# Altium PCB CAM_BRD.PcbDoc
Units mil, origin at the board's own origin, x right, y up, seen from the top; angles counter-clockwise.
Board outline 2100 x 1600 mil, 6 copper layers (Top Layer, GND, SIG_1, SIG_2, GND_2, Bottom Layer), stack 61.112 mil thick; 13 components, 21 nets, 92 pads, 59 vias.
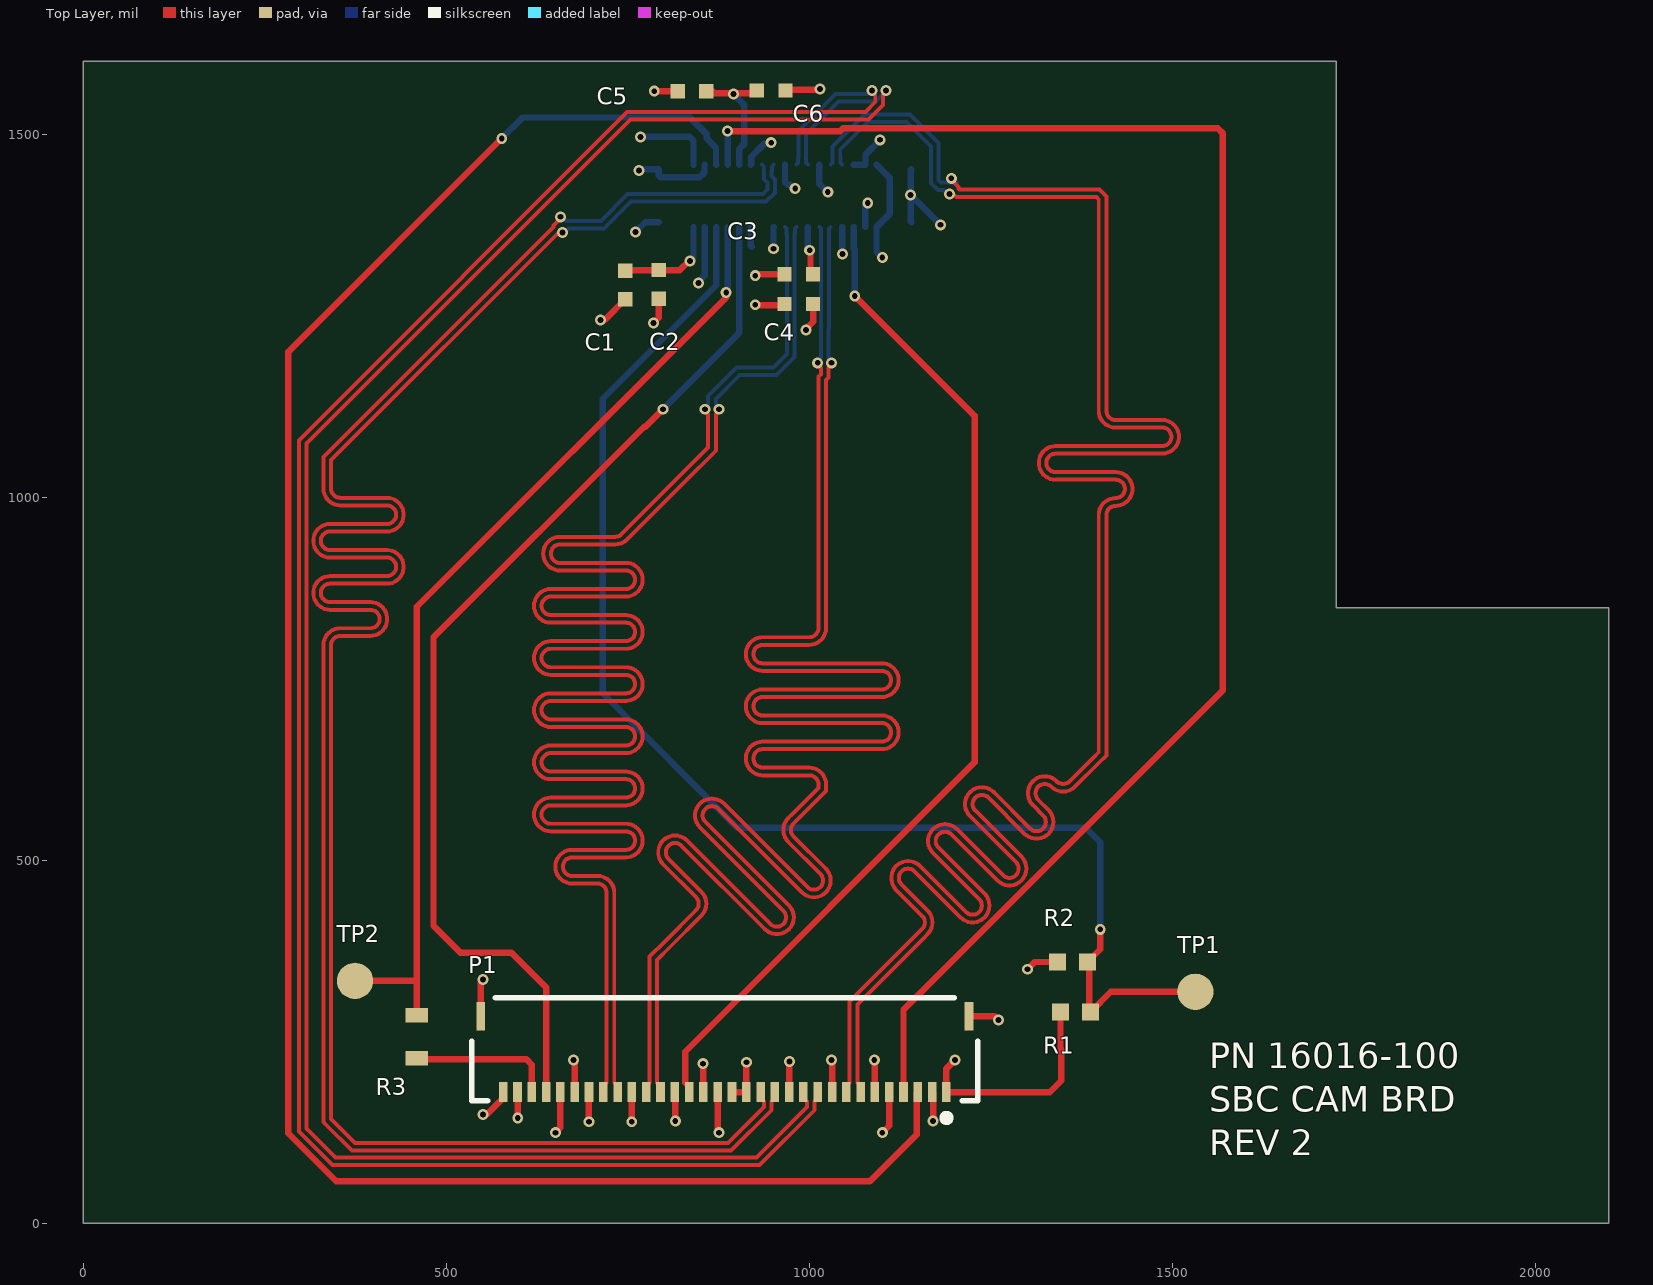
[diagram p0: Top Layer view]
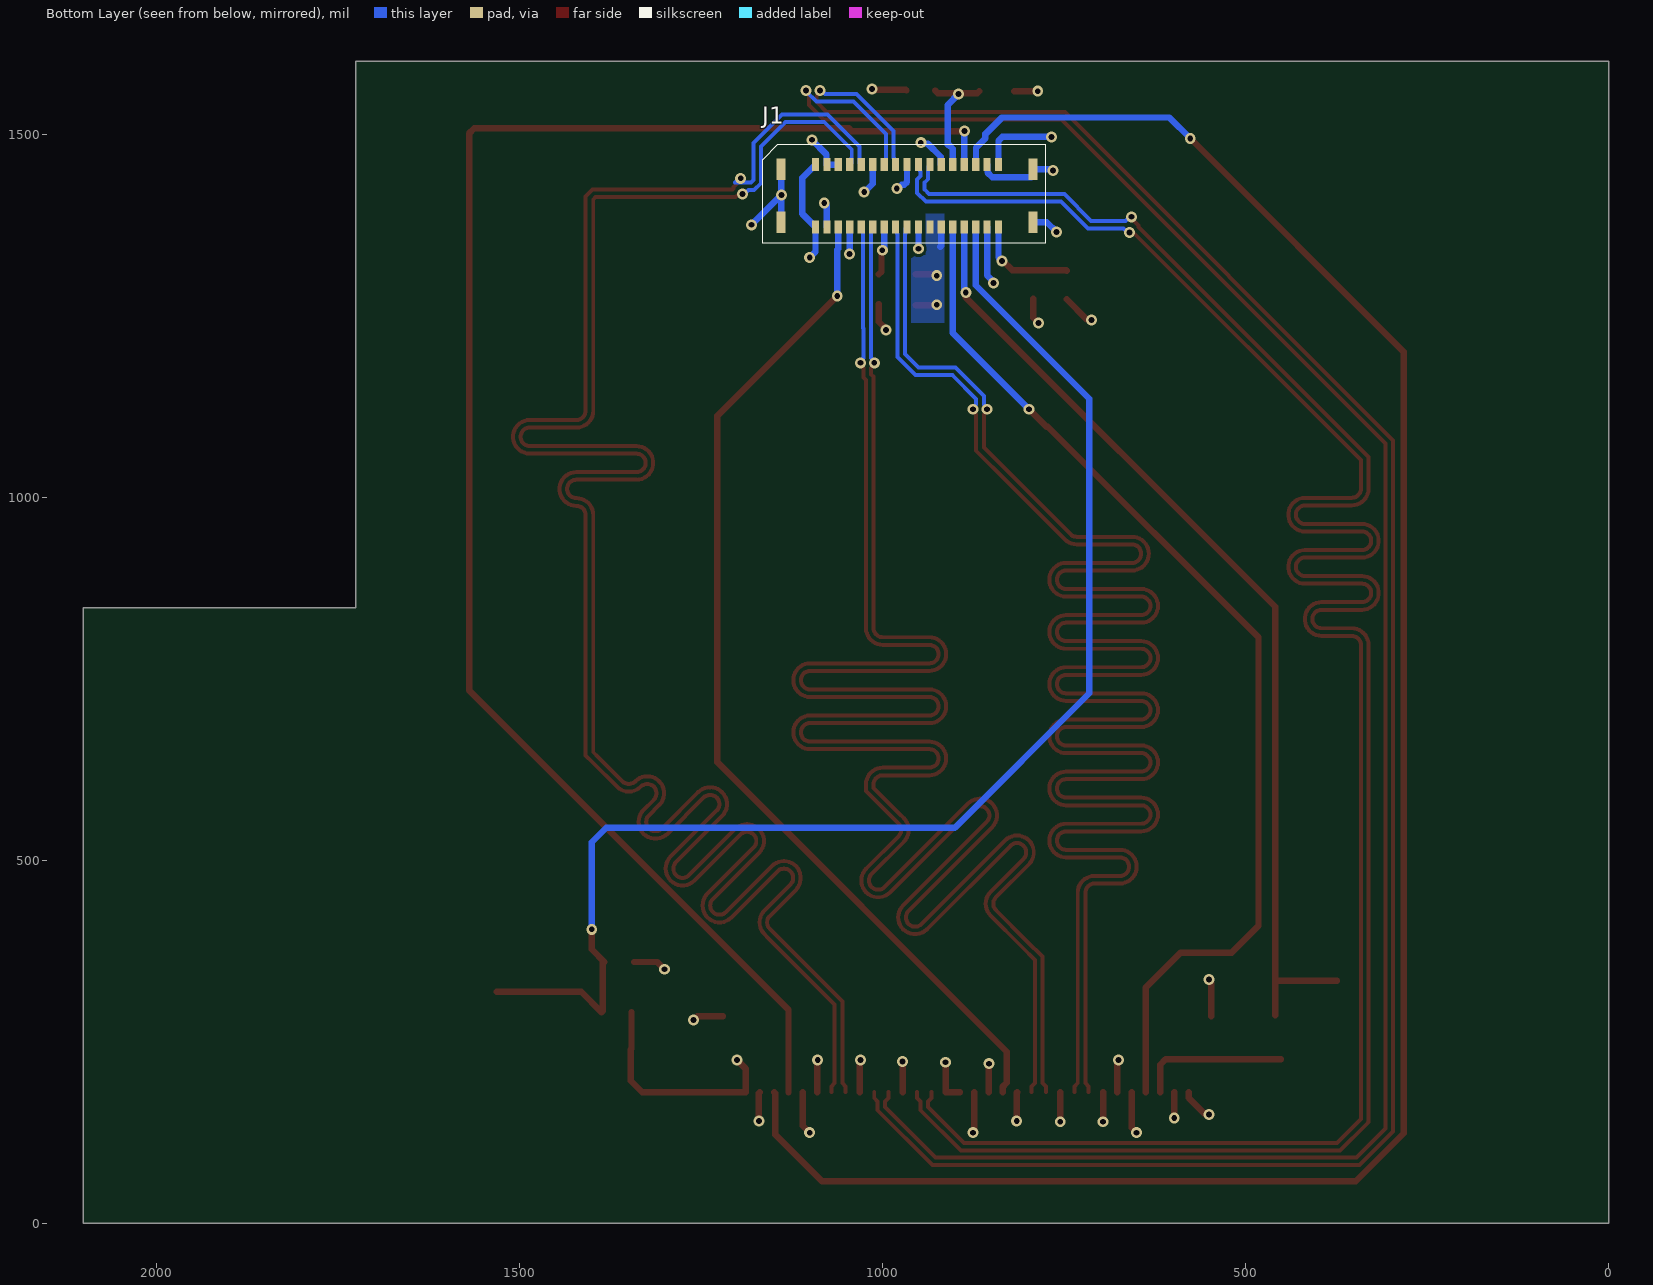
[diagram p1: Bottom Layer view, seen from below]
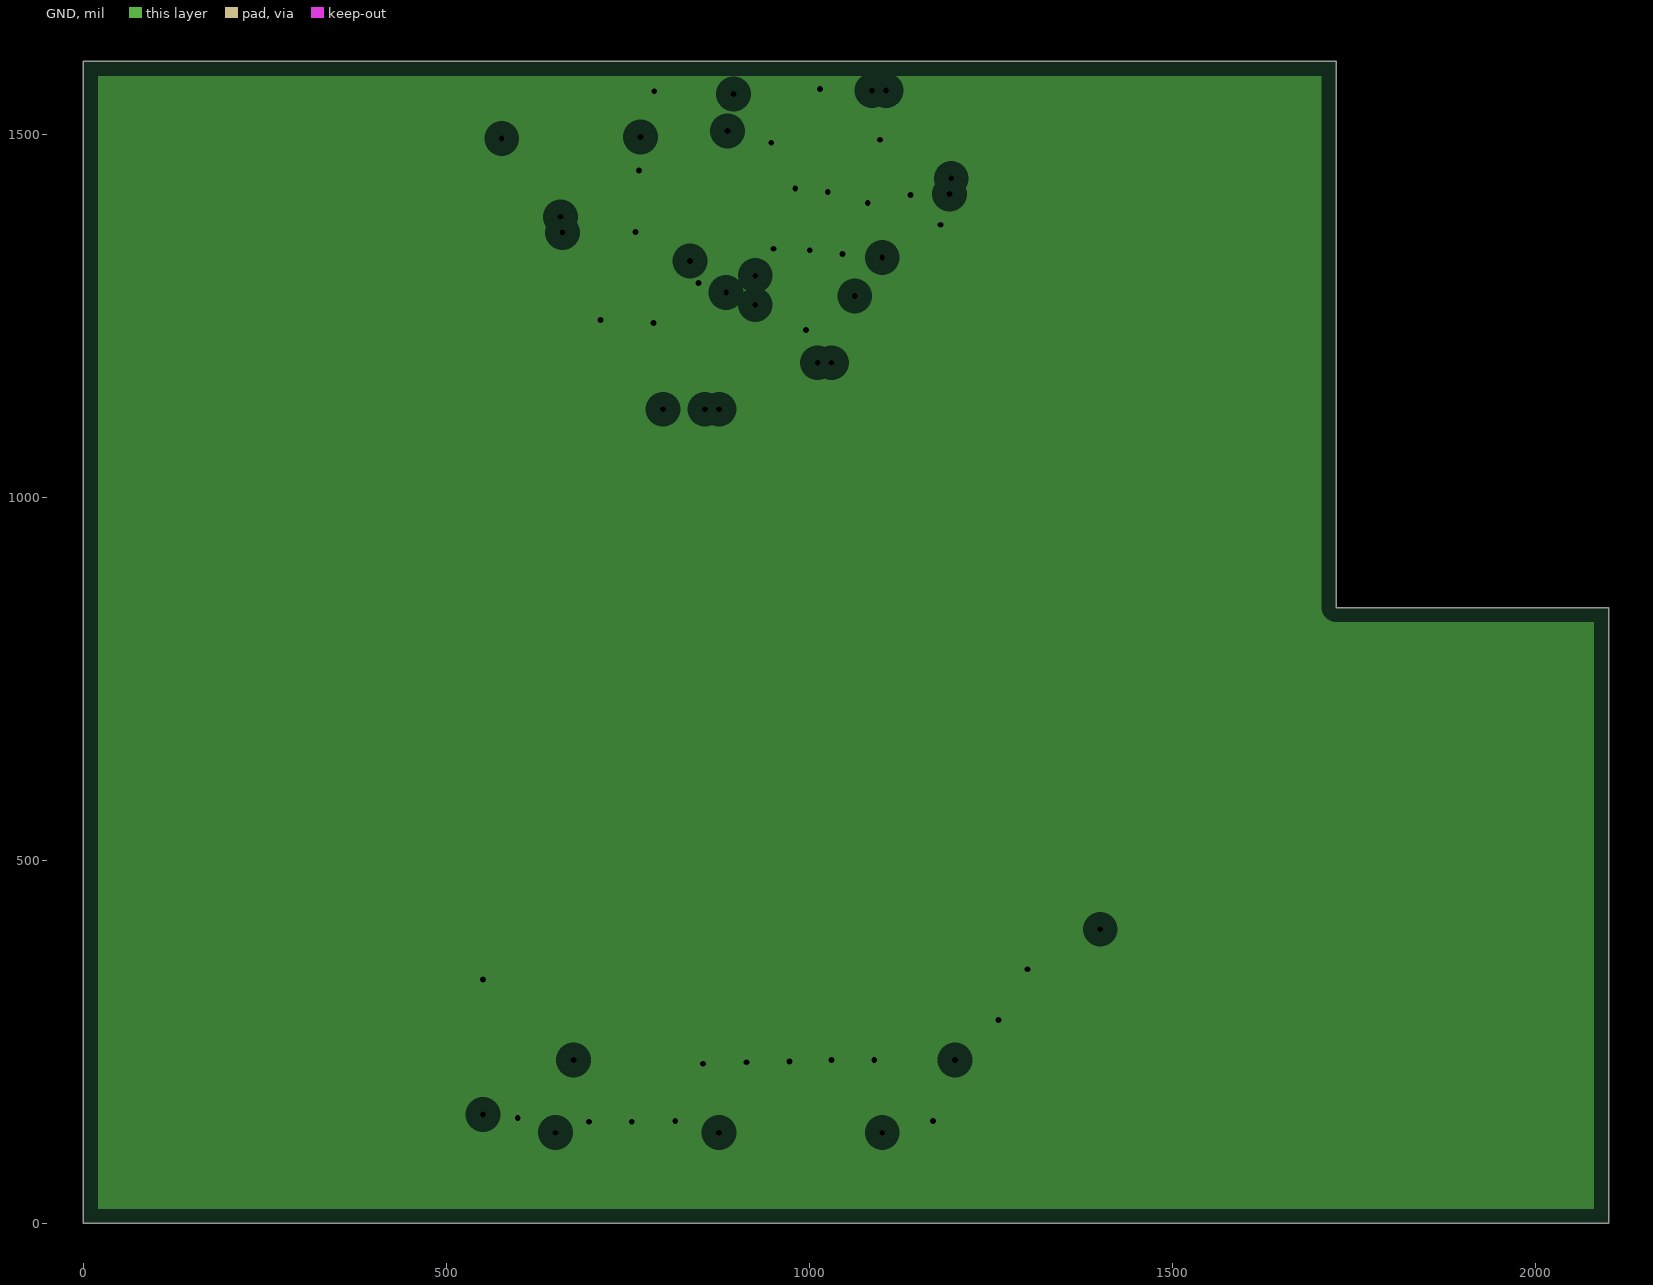
[diagram p2: GND, clearances drawn from the general rule]
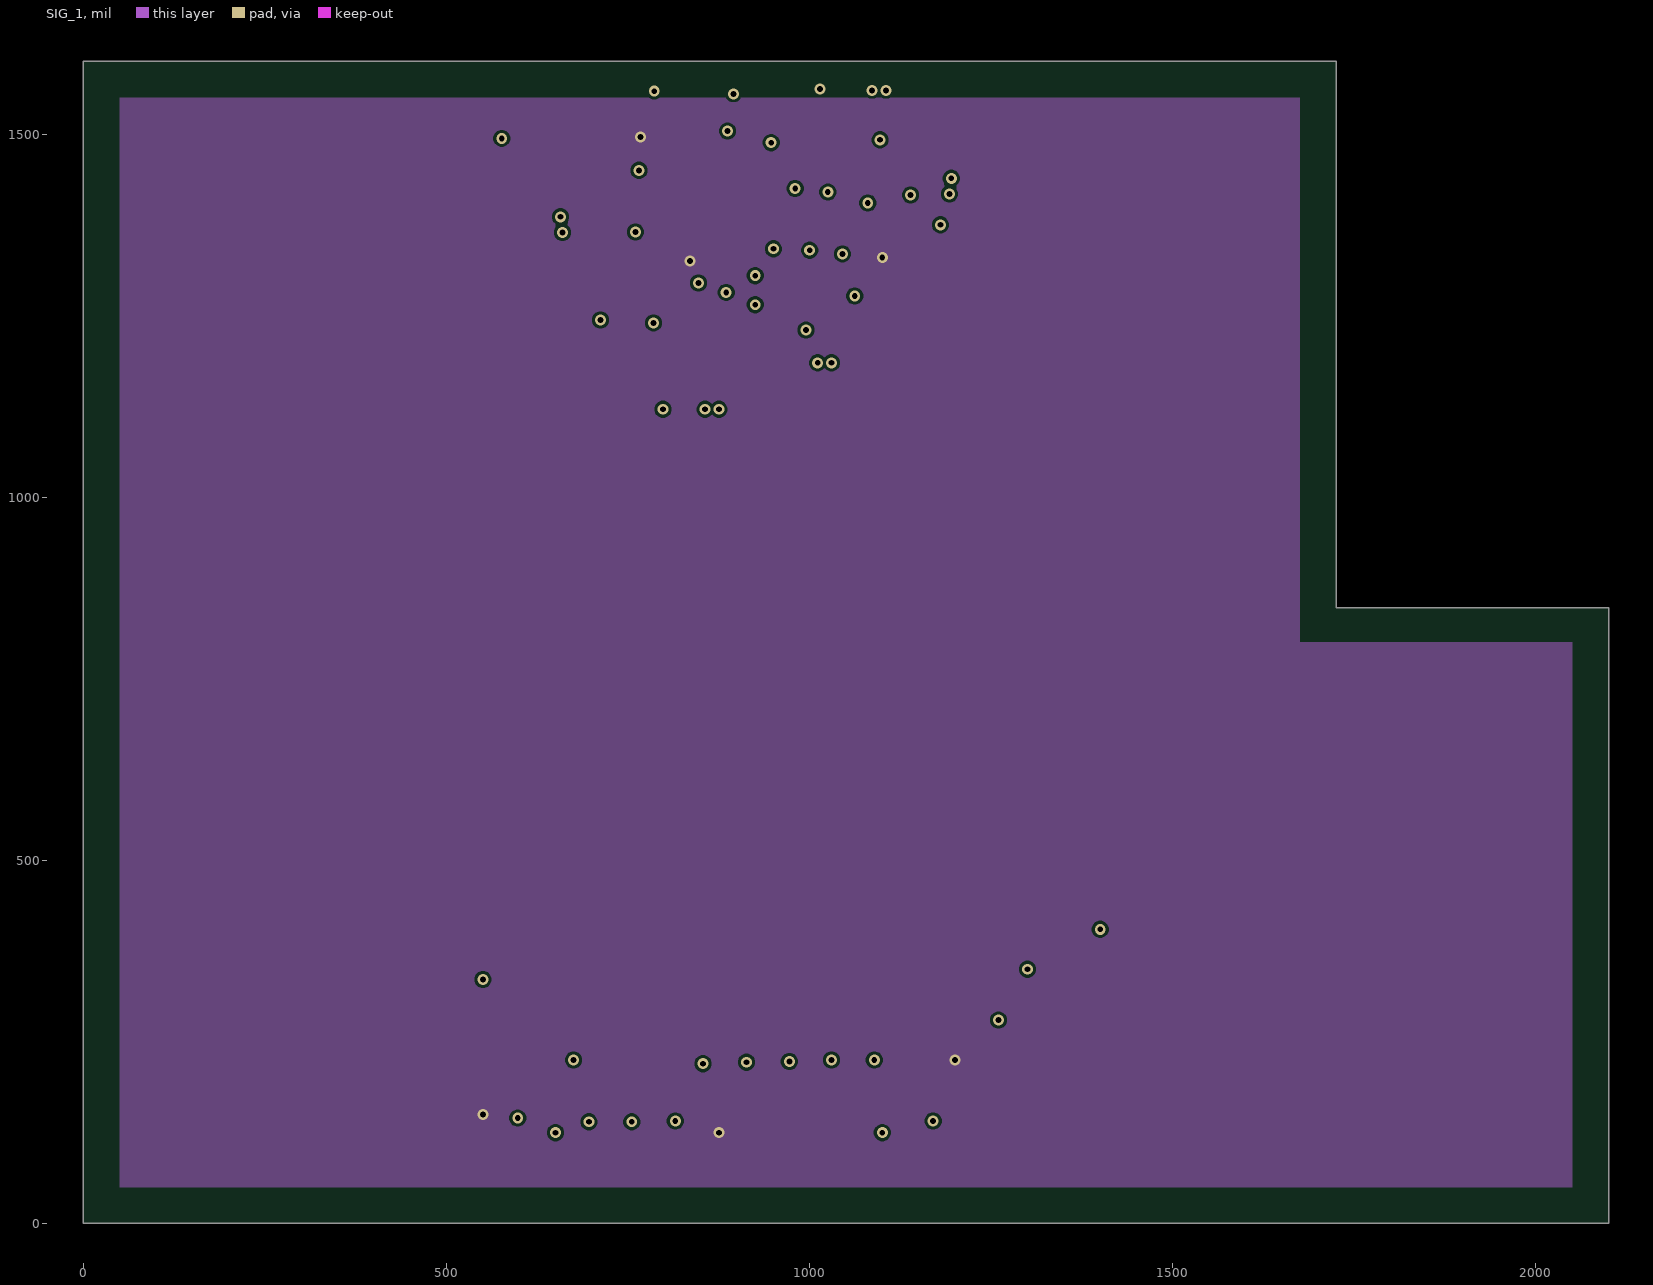
[diagram p3: SIG_1]
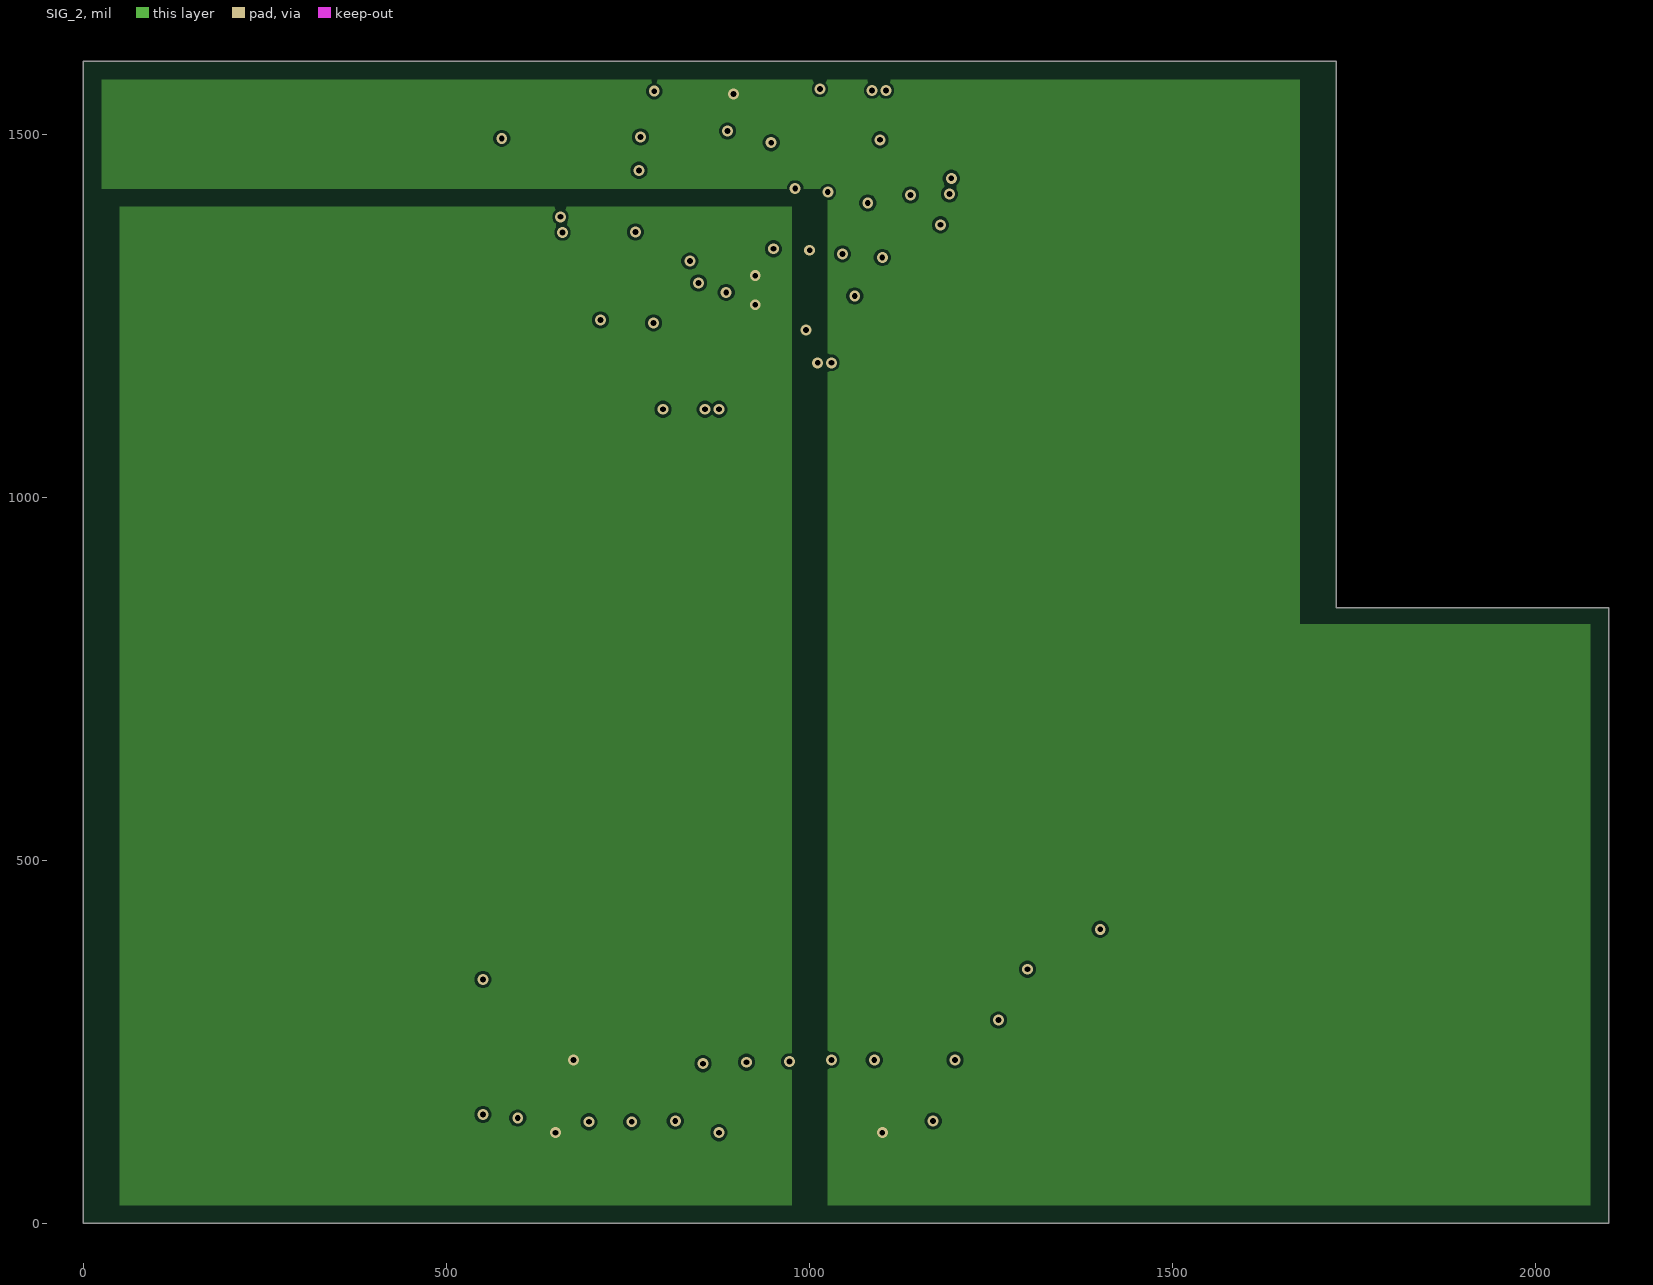
[diagram p4: SIG_2]
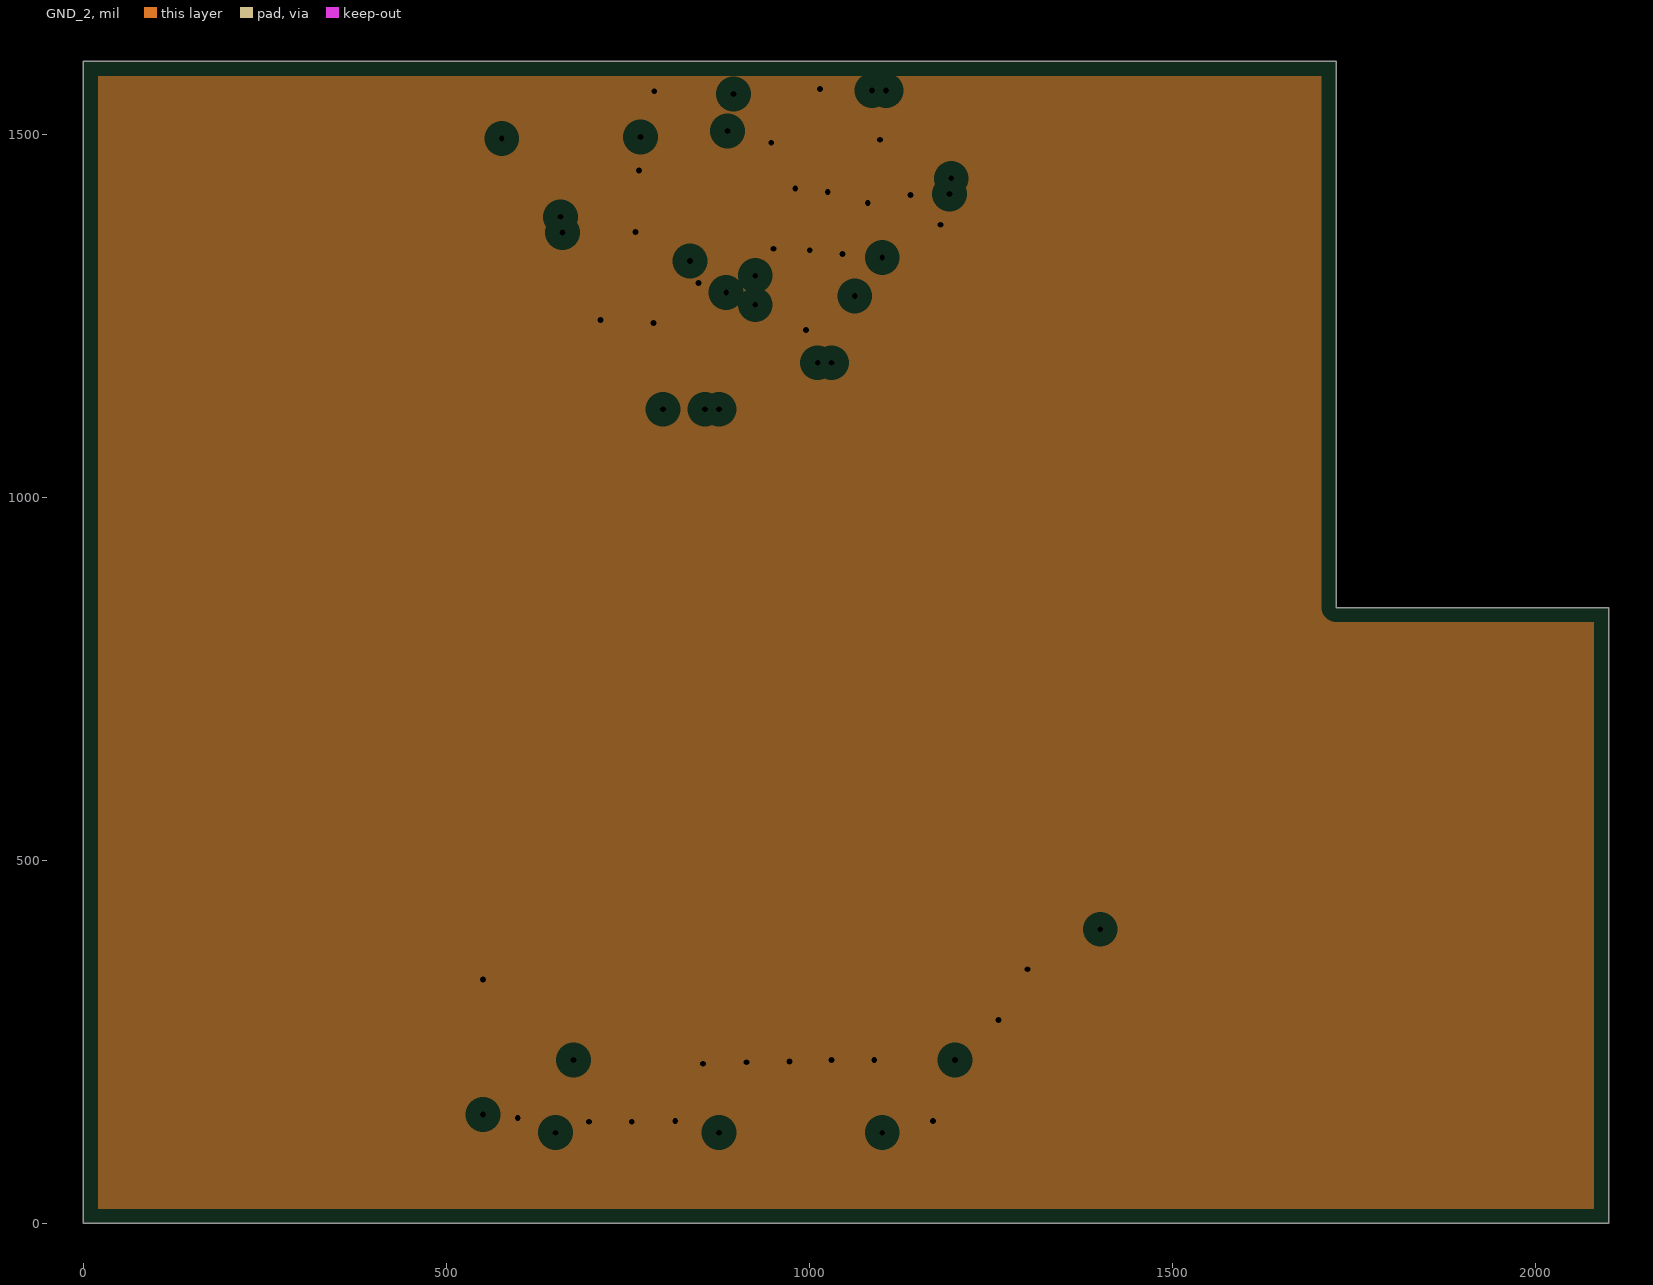
[diagram p5: GND_2, clearances drawn from the general rule]
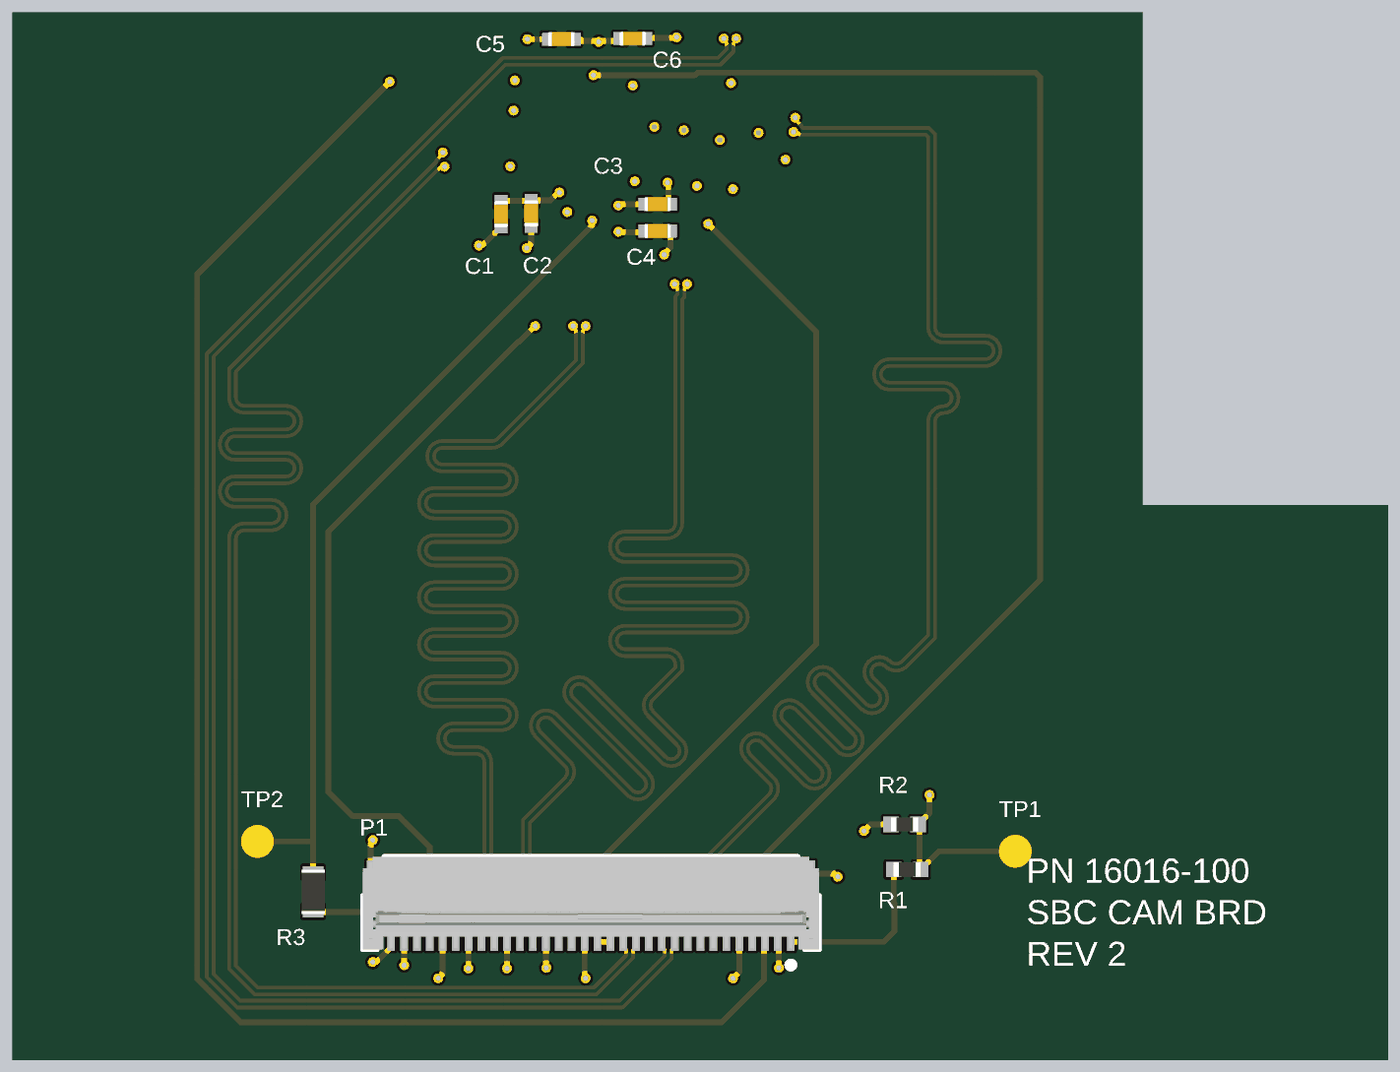
[diagram p6: 3D render of the assembled board from above, using the file's embedded part models]

## Layer stack, top to bottom
Top Solder: solder mask 0.4, Solder Resist, Dk 3.5
Top Layer: signal copper 1.4
Dielectric 2: prepreg 5, PP-006, Dk 4.1
GND: plane copper 1.378, net GND
Dielectric 4: prepreg 15.1, PP-006, Dk 4.1
SIG_1: signal copper 1.378
Dielectric 1: dielectric 12.6, FR-4, Dk 4.8
SIG_2: signal copper 1.378
Dielectric 5: prepreg 15.1, PP-006, Dk 4.1
GND_2: plane copper 1.378, net GND
Dielectric 3: prepreg 5, PP-006, Dk 4.1
Bottom Layer: signal copper 1.4
Bottom Solder: solder mask 0.4, Solder Resist, Dk 3.5

## Board outline
0,0 2100,0 2100,848 1725,848 1725,1600 0,1600

## Design rules (kind name [scope] priority, off if disabled: settings)
Clearance Clearance_diff [IsDifferentialPair] p1: gap=2 ignorepadtopadclearanceinfootprint=TRUE
Clearance [All] p2: gap=4 ignorepadtopadclearanceinfootprint=TRUE
DiffPairsRouting [All] p1: maxlimit=10.01 minlimit=5 mostfreqgap=10.72 toplayer_maxgap=5 toplayer_prefgap=5 toplayer_minwidth=5.46 toplayer_maxwidth=5.46 toplayer_prefwidth=5.46 midlayer1_mingap=10.01 midlayer1_minwidth=7.02 midlayer1_maxwidth=7.02 midlayer1_prefwidth=7.02 midlayer2_mingap=10.01 midlayer2_minwidth=7.02 midlayer2_maxwidth=7.02 midlayer2_prefwidth=7.02 bottomlayer_maxgap=5 bottomlayer_prefgap=5 bottomlayer_minwidth=5.46 bottomlayer_maxwidth=5.46 bottomlayer_prefwidth=5.46 impedanceprofiledriven=TRUE impedanceprofileid={9B9DB5E2-4D64-4961-AEE6-C745B0BC2751} impedanceprofilevalue=100.000000 maxuncoupledlength=500
MatchedLengths [InDifferentialPairClass('Diff_lanes')] p1: tolerance=50 checknetsindiffpair=FALSE checkdiffpairvsdiffpair=TRUE checkxsignals=TRUE checkothers=TRUE
MinimumSolderMaskSliver [All] p1: minsoldermaskwidth=5
PlaneClearance [All] p1: clearance=20
PlaneConnect [All] p1: planeconnectstyle=Direct reliefexpansion=20 reliefentries=4 reliefconductorwidth=10 reliefairgap=10
PolygonConnect [All] p1: connectstyle=Direct reliefconductorwidth=10 reliefentries=4 polygonreliefangle="90 Angle" airgapwidth=10
RoutingVias [All] p1: holewidth=8 width=15 viastyle="Through Hole" minholewidth=8 minwidth=15 maxholewidth=10 maxwidth=20
SolderMaskExpansion [All] p1: expansion=4 istentingtop=FALSE
Width [All] p1: maxlimit=11.99 minlimit=8.82 preferedwidth=10.65 toplayer_maxwidth=8.82 toplayer_prefwidth=8.82 midlayer1_minwidth=11.99 midlayer2_minwidth=11.99 bottomlayer_maxwidth=8.82 bottomlayer_prefwidth=8.82 impedanceprofiledriven=TRUE impedanceprofileid={878C57AC-B8C8-43F7-A392-3AFCA808DB5A} impedanceprofilevalue=50.000000 minimp=50.000000 maximp=50.000000 favimp=50.000000
26 further rules are at their usual default settings.

## Classes and differential pairs
differential pair class Diff_lanes: CS1_P1_D3 CSI_P1_CK CSI_P1_D0 CSI_P1_D1 CSI_P1_D2
component class CAM_BRD: C1 C2 C3 C4 J1 P1 R1 R2 R3 TP1 TP2
differential pair CSI_P1_D2: +CSI_P1_D2_P -CSI_P1_D2_N
differential pair CSI_P1_D1: +CSI_P1_D1_P -CSI_P1_D1_N
differential pair CSI_P1_D0: +CSI_P1_D0_P -CSI_P1_D0_N
differential pair CSI_P1_CK: +CSI_P1_CK_P -CSI_P1_CK_N
differential pair CS1_P1_D3: +CS1_P1_D3_P -CS1_P1_D3_N

## Components (designator, comment, footprint, x,y, rotation, side; value= is the part's Value field where it differs from the comment)
C1 "10uF" CAPC0402X06N 746,1292 r90 top
C2 "0.1uF" CAPC0402X06N 792,1293 r90 top
C3 "10uF" CAPC0402X06N 985,1307 r180 top
C4 "0.1uF" CAPC0402X06N 985,1266 r180 top
C5 "10uF" CAPC0402X06N 838,1559 r0 top
C6 "0.1uF" CAPC0402X06N 947,1560 r180 top
J1 "BM20B(0.8)-34DS-0.4V(53)" BM20 1139.64,1414.91 r180 bottom locked
P1 "503480-3200" "32POS-0.5MM PITCH" 883.15,232.88 r180 top locked
R1 "DNP" RESC0402X04N 1366,291 r180 top
R2 "DNP" RESC0402X04N 1362,360 r0 top
R3 "*" RESC0603X06N 459,257 r90 top
TP1 "=VALUE" "Test Point" 1531,319 r270 top
TP2 "=VALUE" "Test Point" 374,334 r270 top

## Footprints (in the part's own frame and the unit in brackets; to place one, negate y for a bottom-side part, rotate by r counter-clockwise, add the part's x,y. Pads: shape width x height; smd on the part's side, far side on the other; paste and mask are expansions set on the pad)
"32POS-0.5MM PITCH" [mm] "FPC Connector, 32-Leads, Right Angle, Pitch 0.5 mm, Mated Height 1.0 mm, SMT"
  rect 0.3x0.7 smd: 1(-7.75,1.325) 2(-7.25,1.325) 3(-6.75,1.325) 4(-6.25,1.325) 5(-5.75,1.325) 6(-5.25,1.325) 7(-4.75,1.325) 8(-4.25,1.325) 9(-3.75,1.325) 10(-3.25,1.325) 11(-2.75,1.325) 12(-2.25,1.325) 13(-1.75,1.325) 14(-1.25,1.325) 15(-0.75,1.325) 16(-0.25,1.325) 17(0.25,1.325) 18(0.75,1.325) 19(1.25,1.325) 20(1.75,1.325) 21(2.25,1.325) 22(2.75,1.325) 23(3.25,1.325) 24(3.75,1.325) 25(4.25,1.325) 26(4.75,1.325) 27(5.25,1.325) 28(5.75,1.325) 29(6.25,1.325) 30(6.75,1.325) 31(7.25,1.325) 32(7.75,1.325)
  rect 0.3x1 smd: MP1(-8.54,-1.325) MP2(8.54,-1.325)
  silkscreen extent -8.85,-1.98 8.85,2.35, body extent -8.85,-1.97 8.85,1.63, height 1.91
BM20 [mil] "BM20B(0.8)-34DS-0.4V(53)"
  rect 10x18 smd: 1(47.64,42.91) 2(63.39,42.91) 3(79.14,42.91) 4(94.89,42.91) 5(110.64,42.91) 6(126.39,42.91) 7(142.14,42.91) 8(157.89,42.91) 9(173.64,42.91) 10(189.39,42.91) 11(205.14,42.91) 12(220.89,42.91) 13(236.64,42.91) 14(252.39,42.91) 15(268.14,42.91) 16(283.89,42.91) 17(299.64,42.91) 18(299.64,-42.91) 19(283.89,-42.91) 20(268.14,-42.91) 21(252.39,-42.91) 22(236.64,-42.91) 23(220.89,-42.91) 24(205.14,-42.91) 25(189.39,-42.91) 26(173.64,-42.91) 27(157.89,-42.91) 28(142.14,-42.91) 29(126.39,-42.91) 30(110.64,-42.91) 31(94.89,-42.91) 32(79.14,-42.91) 33(63.39,-42.91) 34(47.64,-42.91)
  rect 12.2x29.53 smd: G1(0,36.42) G2(347.28,36.42) G3(347.28,-36.42) G4(0,-36.42)
  silkscreen extent -25,-65 365,70, body extent -9,-44 357,47, height 32
CAPC0402X06N [mm] "Chip Capacitor, 2-Leads, Body 04x02mil, IPC Medium Density"
  rect 0.5x0.5 smd: 1(-0.5,0) 2(0.5,0)
  body extent -0.53,-0.28 0.53,0.28, height 0.55
RESC0402X04N [mm] "Chip Resistor, 2-Leads, Body 4x2mil, IPC Medium Density"
  rect 0.6x0.6 smd: 1(-0.525,0) 2(0.525,0)
  body extent -0.53,-0.28 0.53,0.28, height 0.4
RESC0603X06N [mm] "Chip Resistor, 2-Leads, Body 06x03mil, IPC Medium Density"
  rect 0.5x0.8 smd: 1(-0.75,0) 2(0.75,0)
  body extent -0.85,-0.45 0.85,0.45, height 0.55
"Test Point" [mil] "50 mil exposed copper test point"
  round 50 smd paste-1220.47 mask+0: 1(0,0)

## Part data
C1: library part "Cap NP", "Non-polarized Capactior", Manufacturer 1="AVX Corporation", Manufacturer Part Number 1=06036A100FAT2A
C2: library part "Cap NP", "Non-polarized Capactior", Manufacturer 1="Walsin Technology Corporation", Manufacturer Part Number 1=0603B104J500CT
C3 C5: library part "Cap NP", "Non-polarized Capactior", Manufacturer 1="AVX Corporation", Manufacturer Partnumber 1=06036A100FAT2A
C4 C6: library part "Cap NP", "Non-polarized Capactior", Manufacturer 1="Walsin Technology Corporation", Manufacturer Partnumber 1=0603B104J500CT
J1: "34 Position Connector Receptacle, Center Strip Contacts Surface Mount Gold", Manufacturer 1="Hirose Electric Co Ltd", Manufacturer Part Number 1=BM20B(0.8)-34DS-0.4V(53)
P1: "0.5 mm Pitch Easy-On(TM) BackFlip(TM) Type FPC Connector, 1.0 mm Mated Height, Right Angle, SMT, Dual Contact, 32 Circuits, -40 to 85 degC, ELV and RoHS Compliant, Tape and Reel", Current (Max per Contact)=0.5A, Manufacturer 1=Molex, Voltage (Max)="50V AC (RMS)/DC", Circuits (Loaded)=32, ComponentLink1Description="Manufacturer URL", ComponentLink1URL=http://www.molex.com/molex/index.jsp, ComponentLink2Description=Datasheet, ComponentLink2URL=http://www.molex.com/webdocs/datasheets/pdf/en-us/5034803200_FFC_FPC_CONNECTORS.pdf, ComponentLink3Description="Package Specification", ComponentLink3URL=http://www.molex.com/pdm_docs/sd/5034803200_sd.pdf, Contact Position=Dual, Durability (mating cycles max)=10, Entry Angle="90degrees Angle", Manufacturer Part Number 1=503480-3200, Mated Height=1.00mm, Material - Metal="Phosphor Bronze", Material - Plating Mating=Gold, Material - Plating Termination="Gold, Tin", Mounting Technology="Surface Mount", Number of Rows=1, Orientation="Right Angle", PackageDescription="32-Lead FPC Connector, Pitch 0.5 mm", PackageReference=503480-3200, PackageVersion="Rev. F, 09/2012", Packing="Tape and Reel", PCB Locator=No, PCB Retention=Yes, Pitch - Mating Interface=0.50mm, Polarized to PCB=Yes, RoHS=TRUE, Stackable=No
R1 R2 R3: library part Res, "Resistor"
TP1 TP2: library part Test, "Test point"

## Via types
v1: diameter 15, hole 8, Top Layer to Bottom Layer, 59 vias

## Nets (pads, with @x,y where several pads share a name; then routed paths per layer and width w, separated by ;. In a path a pad name is that pad's centre, name@x,y a point inside that pad or via, vN(x,y) a via of type N, cw(c..) or ccw(c..) an arc to the next point about the centre after c; other vN are vias at no path point)
C1_FLASH: J1.15 P1.3 | length 2821.4
  Top Layer w8.82: v1(576,1494) 282,1200 282,124 348,58 1083,58 1147.4,122.4 1147.4,179.22 P1.3
  Bottom Layer w8.82: v1(576,1494) 604.82,1522.82 835.31,1522.82 858,1500.13 858,1494 871,1481 871,1458.33 J1.15
C1_RESET: P1.30 R3.1 | length 207.4
  Top Layer w8.82: R3.1@451,226 610,226 617.4,218.6 P1.30
C1_RESETPWR: J1.21 R3.2 TP2.1 | length 1348.7
  Top Layer w8.82: TP2.1 457,334 459,332 ; R3.2 459,332 ; v1(885,1282) 885,1275 459,849 459,332
  Bottom Layer w8.82: v1(885,1282) 885,1283.67 887.25,1285.92 J1.21
CS1_P1_D3_N: J1.11 P1.13 | length 2925.1
  Top Layer w5.46: v1(657,1386) 657,1383.42 647.34,1373.76 647.34,1372.13 330.54,1055.33 330.54,1019.78 330.54,1011.82 ccw(c353.73,1011.82) 353.73,988.63 417.81,988.63 cw(c417.81,975.9) 417.81,963.17 339.65,963.17 ccw(c339.65,939.99) 339.65,916.8 417.81,916.8 cw(c417.81,904.07) 417.81,891.34 339.65,891.34 ccw(c339.65,868.15) 339.65,844.96 395.15,844.96 cw(c395.15,832.23) 395.15,819.5 353.73,819.5 ccw(c353.73,796.31) 330.54,796.31 330.54,473.28 330.54,139.67 333.6,136.6 369.9,100.31 891.88,100.31 947.44,155.87 947.44,168.22 952.05,172.84 P1.13
  Bottom Layer w5.46: v1(657,1386) 659.37,1386 664.97,1380.4 712.4,1380.4 749.46,1417.46 935.67,1417.46 941.6,1423.4 941.6,1433.31 937.15,1437.77 937.15,1448.36 936.77,1448.74 936.77,1455.56 J1.11
CS1_P1_D3_P: J1.10 P1.14 | length 2883.7
  Top Layer w5.46: v1(659.67,1364.33) 659.26,1364.74 654.74,1364.74 341,1051 341,1019.78 341,1011.82 ccw(c353.73,1011.82) 353.73,999.09 417.81,999.09 cw(c417.81,975.9) 417.81,952.71 339.65,952.71 ccw(c339.65,939.99) 339.65,927.26 417.81,927.26 cw(c417.81,904.07) 417.81,880.88 339.65,880.88 ccw(c339.65,868.15) 339.65,855.42 395.15,855.42 cw(c395.15,832.23) 395.15,809.04 353.73,809.04 ccw(c353.73,796.31) 341,796.31 341,473.28 341,144 374.23,110.77 887.55,110.77 936.98,160.2 936.98,168.22 932.36,172.84 P1.14
  Bottom Layer w5.46: v1(659.67,1364.33) 662.03,1364.33 667.63,1369.94 716.73,1369.94 753.79,1407 940,1407 952.06,1419.06 952.06,1437.64 947.6,1442.1 947.6,1448.36 947.98,1448.74 947.98,1455.56 J1.10
CSI1_I2C_SCL: J1.14 P1.4 | length 2235.1
  Top Layer w8.82: v1(887,1504) 1041.93,1504 1045.84,1507.91 1561.83,1507.91 1569,1500.74 1569,733.95 1129.21,294.17 P1.4
  Bottom Layer w8.82: v1(887,1504) 887.12,1503.88 887.12,1457.95 J1.14
CSI1_I2C_SDA: J1.22 P1.29 | length 1472.1
  Top Layer w8.82: P1.29 637.09,324.91 589,373 519,373 482,410 482,807 772,1097 774,1097 v1(798,1121)
  Bottom Layer w8.82: v1(798,1121) 903,1226 J1.22
CSI_P1_CK_N: J1.8 P1.10 | length 2915.3
  Top Layer w5.46: P1.10 1011.1,172.84 1006.49,168.22 1006.49,155.87 931.01,80.39 342.82,80.39 299.6,123.6 296.54,126.67 296.54,1078.33 748.67,1530.46 1076.58,1530.46 1090.27,1544.15 1090.27,1553.15 1086,1557.42 v1(1086,1560)
  Bottom Layer w5.46: J1.8 984.02,1460.1 984.02,1466.92 984.4,1467.3 984.4,1504.19 1035.44,1555.23 1078.65,1555.23 1083.42,1560 v1(1086,1560)
CSI_P1_CK_P: J1.7 P1.11 | length 2887.3
  Top Layer w5.46: P1.11 991.42,172.84 996.03,168.22 996.03,160.2 926.68,90.85 347.15,90.85 307,131 307,1074 753,1520 1080.92,1520 1100.73,1539.81 1100.73,1553.15 1105,1557.42 v1(1105,1560)
  Bottom Layer w5.46: J1.7 995.23,1460.1 995.23,1466.92 994.85,1467.3 994.85,1499.85 1039.77,1544.77 1078.65,1544.77 1090.89,1544.77 1105,1558.88 v1(1105,1560)
CSI_P1_D0_N: J1.5 P1.7 | length 2937.5
  Top Layer w5.46: P1.7 1070.16,188.59 1065.55,193.2 1065.55,301.55 1156.61,392.61 1162.23,398.23 ccw(c1145.84,414.63) 1162.23,431.03 1126.47,466.79 cw(c1135.48,475.79) 1126.47,484.79 cw(c1135.48,475.79) 1144.48,484.79 1207.88,421.38 ccw(c1224.28,437.78) 1240.67,421.38 ccw(c1224.28,437.78) 1240.67,454.18 1177.27,517.58 cw(c1186.27,526.58) 1177.27,535.59 cw(c1186.27,526.58) 1195.27,535.59 1258.68,472.18 ccw(c1275.07,488.58) 1291.47,472.18 ccw(c1275.07,488.58) 1291.47,504.97 1228.07,568.38 cw(c1237.07,577.38) 1228.07,586.38 cw(c1237.07,577.38) 1246.07,586.38 1295.99,536.46 ccw(c1312.39,552.86) 1328.78,536.46 ccw(c1312.39,552.86) 1328.78,569.25 1314.62,583.42 cw(c1323.62,592.42) 1314.62,601.42 cw(c1323.62,592.42) 1332.62,601.42 ccw(c1349.02,617.82) 1365.42,601.42 1398.69,634.69 1408.46,644.46 1408.46,665.35 1408.46,975.37 cw(c1421.19,975.37) 1421.19,988.1 ccw(c1421.19,1011.29) 1421.19,1034.47 1338.56,1034.47 cw(c1338.56,1047.2) 1338.56,1059.93 1485.27,1059.93 ccw(c1485.27,1083.12) 1485.27,1106.31 1421.19,1106.31 cw(c1421.19,1119.04) 1408.46,1119.04 1408.46,1127 1408.46,1414.13 1399.13,1423.46 1206.33,1423.46 1204.66,1425.13 1204.66,1426.76 1195,1436.42 v1(1195,1439)
  Bottom Layer w5.46: J1.5 1031.27,1460.1 1031.27,1466.92 1031.65,1467.3 1031.65,1483.03 1075.61,1527 1137.92,1527 1177.57,1487.34 1177.57,1436.59 1180.77,1433.4 1202.97,1433.4 1197.36,1439 v1(1195,1439)
CSI_P1_D0_P: J1.4 P1.8 | length 2880.2
  Top Layer w5.46: P1.8 1050.47,188.59 1055.09,193.2 1055.09,305.88 1149.21,400 1154.84,405.63 ccw(c1145.84,414.63) 1154.84,423.63 1119.08,459.39 cw(c1135.48,475.79) 1119.08,492.18 cw(c1135.48,475.79) 1151.87,492.18 1215.28,428.78 ccw(c1224.28,437.78) 1233.28,428.78 ccw(c1224.28,437.78) 1233.28,446.78 1169.87,510.19 cw(c1186.27,526.58) 1169.87,542.98 cw(c1186.27,526.58) 1202.67,542.98 1266.07,479.58 ccw(c1275.07,488.58) 1284.07,479.58 ccw(c1275.07,488.58) 1284.08,497.58 1220.67,560.98 cw(c1237.07,577.38) 1220.67,593.78 cw(c1237.07,577.38) 1253.46,593.78 1303.39,543.85 ccw(c1312.39,552.86) 1321.39,543.85 ccw(c1312.39,552.86) 1321.39,561.86 1307.23,576.02 cw(c1323.62,592.42) 1307.23,608.81 cw(c1323.62,592.42) 1340.02,608.81 ccw(c1349.02,617.82) 1358.02,608.81 1391.29,642.08 1398,648.79 1398,665.35 1398,975.37 cw(c1421.19,975.37) 1421.19,998.56 ccw(c1421.19,1011.29) 1421.19,1024.01 1338.56,1024.01 cw(c1338.56,1047.2) 1338.56,1070.39 1485.27,1070.39 ccw(c1485.27,1083.12) 1485.27,1095.85 1421.19,1095.85 cw(c1421.19,1119.04) 1398,1119.04 1398,1127 1398,1409.8 1394.8,1413 1202,1413 1197.26,1417.74 1192.74,1417.74 v1(1192.33,1417.33)
  Bottom Layer w5.46: J1.4 1042.48,1460.1 1042.48,1466.92 1042.1,1467.3 1042.1,1478.7 1079.94,1516.54 1133.58,1516.54 1167.11,1483.01 1167.11,1432.26 1176.44,1422.94 1184.37,1422.94 1189.97,1417.33 v1(1192.33,1417.33)
CSI_P1_D1_N: J1.29 P1.22 | length 2920
  Top Layer w5.46: P1.22 774.88,188.59 779.5,193.2 779.5,367.29 800.6,388.4 843.49,431.28 ccw(c834.48,440.28) 843.49,449.28 798.17,494.59 cw(c814.57,510.99) 798.17,527.39 cw(c814.57,510.99) 830.97,527.39 945.9,412.45 ccw(c954.9,421.45) 963.9,412.45 ccw(c954.9,421.45) 963.9,430.45 848.97,545.39 cw(c865.37,561.79) 848.97,578.18 cw(c865.37,561.79) 881.76,578.18 996.7,463.25 ccw(c1005.7,472.25) 1014.7,463.25 ccw(c1005.7,472.25) 1014.7,481.25 970.51,525.44 cw(c986.87,541.87) 970.48,558.27 976.1,563.9 990.64,578.43 1012.07,599.86 1012.07,604.35 ccw(c999.34,604.35) 999.34,617.08 935.26,617.08 cw(c935.26,640.27) 912.07,640.27 cw(c935.26,640.27) 935.26,663.46 1099.34,663.46 ccw(c1099.34,676.19) 1112.07,676.19 ccw(c1099.34,676.19) 1099.34,688.92 935.26,688.92 cw(c935.26,712.11) 912.07,712.11 cw(c935.26,712.11) 935.26,735.3 1099.34,735.3 ccw(c1099.34,748.03) 1112.07,748.03 ccw(c1099.34,748.03) 1099.34,760.76 935.26,760.76 cw(c935.26,783.95) 912.07,783.95 cw(c935.26,783.95) 935.26,807.13 999.34,807.13 ccw(c999.34,819.86) 1012.07,819.86 1012.07,1137.7 1012.07,1165.95 1015.27,1169.15 1015.27,1178.15 1011,1182.42 v1(1011,1185)
  Bottom Layer w5.46: v1(1011,1185) 1011,1187.58 1015.27,1191.85 1015.27,1236.37 1015.9,1236.99 1015.9,1362.53 1015.52,1362.91 1015.52,1369.73 J1.29
CSI_P1_D1_P: J1.30 P1.21 | length 2920
  Top Layer w5.46: P1.21 794.57,188.59 789.96,193.2 789.96,362.96 808,381 850.88,423.88 ccw(c834.48,440.28) 850.88,456.68 805.57,501.99 cw(c814.57,510.99) 805.57,519.99 cw(c814.57,510.99) 823.57,519.99 938.51,405.06 ccw(c954.9,421.45) 971.3,405.05 ccw(c954.9,421.45) 971.3,437.85 856.36,552.78 cw(c865.37,561.79) 856.36,570.79 cw(c865.37,561.79) 874.37,570.79 989.3,455.85 ccw(c1005.7,472.25) 1022.1,455.85 ccw(c1005.7,472.25) 1022.1,488.64 977.87,532.87 cw(c986.87,541.87) 977.87,550.87 983.5,556.5 1005.43,578.43 1022.53,595.53 1022.53,604.35 ccw(c999.34,604.35) 999.34,627.54 935.26,627.54 cw(c935.26,640.27) 922.53,640.27 cw(c935.26,640.27) 935.26,653 1099.34,653 ccw(c1099.34,676.19) 1122.53,676.19 ccw(c1099.34,676.19) 1099.34,699.38 935.26,699.38 cw(c935.26,712.11) 922.53,712.11 cw(c935.26,712.11) 935.26,724.84 1099.34,724.84 ccw(c1099.34,748.03) 1122.53,748.03 ccw(c1099.34,748.03) 1099.34,771.22 935.26,771.22 cw(c935.26,783.95) 922.53,783.95 cw(c935.26,783.95) 935.26,796.67 999.34,796.67 ccw(c999.34,819.86) 1022.53,819.86 1022.53,1137.7 1022.53,1161.62 1025.73,1164.81 1025.73,1178.15 1030,1182.42 v1(1030,1185)
  Bottom Layer w5.46: J1.30 1026.73,1369.73 1026.73,1362.91 1026.35,1362.53 1026.35,1232.66 1025.73,1232.04 1025.73,1191.85 1030,1187.58 v1(1030,1185)
CSI_P1_D2_N: J1.26 P1.25 | length 2915
  Top Layer w5.46: 649.77,491.22 ccw(c672.96,491.22) 672.96,468.04 707.71,468.04 cw(c707.71,455.31) 720.44,455.31 720.44,403.32 720.44,395.7 720.44,392 720.44,193.2 715.83,188.59 P1.25 ; 649.77,491.23 cw(c672.96,491.23) 672.96,514.41 746.85,514.41 ccw(c746.85,527.14) 759.58,527.14 ccw(c746.85,527.14) 746.85,539.87 643.63,539.87 cw(c643.63,563.06) 620.44,563.06 cw(c643.63,563.06) 643.63,586.25 746.85,586.25 ccw(c746.85,598.98) 759.58,598.98 ccw(c746.85,598.98) 746.85,611.71 643.63,611.71 cw(c643.63,634.9) 620.44,634.9 cw(c643.63,634.9) 643.63,658.09 746.85,658.09 ccw(c746.85,670.82) 759.58,670.82 ccw(c746.85,670.82) 746.85,683.55 643.63,683.55 cw(c643.63,706.73) 620.44,706.73 cw(c643.63,706.73) 643.63,729.92 746.85,729.92 ccw(c746.85,742.65) 759.58,742.65 ccw(c746.85,742.65) 746.85,755.38 643.63,755.38 cw(c643.63,778.57) 620.44,778.57 cw(c643.63,778.57) 643.63,801.76 746.85,801.76 ccw(c746.85,814.49) 759.58,814.49 ccw(c746.85,814.49) 746.85,827.22 643.63,827.22 cw(c643.63,850.41) 620.44,850.41 cw(c643.63,850.41) 643.63,873.6 746.85,873.6 ccw(c746.85,886.33) 759.58,886.33 ccw(c746.85,886.33) 746.85,899.06 656.31,899.06 cw(c656.31,922.24) 633.12,922.24 cw(c656.31,922.24) 656.31,945.43 732.2,945.43 ccw(c732.2,958.16) 741.2,949.16 812.04,1020 860.27,1068.23 860.27,1114.15 856,1118.42 v1(856,1121)
  Bottom Layer w5.46: v1(856,1121) 856,1123.58 860.27,1127.85 860.27,1139.56 899.34,1178.64 950.05,1178.64 968.65,1197.23 968.65,1362.53 968.27,1362.91 968.27,1369.73 J1.26
CSI_P1_D2_P: J1.27 P1.24 | length 2915.5
  Top Layer w5.46: 660.23,491.22 ccw(c672.96,491.22) 672.96,478.5 707.71,478.5 cw(c707.71,455.31) 730.9,455.31 730.9,403.32 730.9,395.7 730.9,392 730.9,193.2 735.51,188.59 P1.24 ; 660.23,491.23 cw(c672.96,491.23) 672.96,503.95 746.85,503.95 ccw(c746.85,527.14) 770.04,527.14 ccw(c746.85,527.14) 746.85,550.33 643.63,550.33 cw(c643.63,563.06) 630.9,563.06 cw(c643.63,563.06) 643.63,575.79 746.85,575.79 ccw(c746.85,598.98) 770.04,598.98 ccw(c746.85,598.98) 746.85,622.17 643.63,622.17 cw(c643.63,634.9) 630.9,634.9 cw(c643.63,634.9) 643.63,647.63 746.85,647.63 ccw(c746.85,670.82) 770.04,670.82 ccw(c746.85,670.82) 746.85,694.01 643.63,694.01 cw(c643.63,706.73) 630.9,706.73 cw(c643.63,706.73) 643.63,719.46 746.85,719.46 ccw(c746.85,742.65) 770.04,742.65 ccw(c746.85,742.65) 746.85,765.84 643.63,765.84 cw(c643.63,778.57) 630.9,778.57 cw(c643.63,778.57) 643.63,791.3 746.85,791.3 ccw(c746.85,814.49) 770.04,814.49 ccw(c746.85,814.49) 746.85,837.68 643.63,837.68 cw(c643.63,850.41) 630.9,850.41 cw(c643.63,850.41) 643.63,863.14 746.85,863.14 ccw(c746.85,886.33) 770.04,886.33 ccw(c746.85,886.33) 746.85,909.52 656.31,909.52 cw(c656.31,922.24) 643.58,922.24 cw(c656.31,922.24) 656.31,934.97 732.2,934.97 ccw(c732.2,958.16) 748.6,941.77 826.83,1020 870.73,1063.9 870.73,1114.15 875,1118.42 v1(875,1121)
  Bottom Layer w5.46: v1(875,1121) 875,1123.58 870.73,1127.85 870.73,1135.23 903.68,1168.18 954.39,1168.18 979.1,1192.89 979.1,1362.53 979.48,1362.91 979.48,1369.73 J1.27
GND: C1.1 C2.1 C3.1 C4.1 C5.1 C6.1 J1.2 J1.3 J1.6 J1.9 J1.12 J1.16 J1.19 J1.25 J1.28 J1.31 J1.33 J1.G1 J1.G2 J1.G3 J1.G4 P1.2 P1.6 P1.9 P1.12 P1.15 P1.16 P1.18 P1.20 P1.23 P1.26 P1.31 P1.MP1 P1.MP2 R2.1 | length 1497.7
  Top Layer w8.82: P1.MP2 546.93,331.26 550,334.33 v1(550,336) ; P1.31 597.86,180.57 597.86,145.14 v1(598,145) ; v1(696,140) 696.07,140.07 696.07,180.64 P1.26 ; v1(712,1244) 713.18,1245.18 718.87,1245.18 C1.1 ; v1(755,140) 755.1,140.1 755.1,180.61 P1.23 ; v1(785,1240) 792,1247 C2.1 ; v1(786,1559) C5.1 ; P1.20 814.63,180.34 814.63,141.37 v1(815,141) ; v1(853,220) 853.62,219.38 P1.18 ; P1.16 P1.15 912.68,221.68 v1(913,222) ; C6.1 967.68,1561 1013,1561 v1(1014,1562) ; P1.12 971.87,180.84 971.87,222.87 v1(972,223) ; v1(995,1230) 995,1231.67 1004.68,1241.36 C4.1 ; v1@1000,1338.33 v1(1000,1340) 1001.18,1338.82 1001.18,1310.5 C3.1 ; v1(1030,225) 1030.79,224.21 P1.9 ; v1(1089,225) 1089.42,224.58 1089.42,181.13 P1.6 ; P1.2 1170,179.29 v1(1170,141) ; P1.MP1 1254.96,285.04 v1(1260,280) ; v1(1300,350) 1310,360 R2.1
  Bottom Layer w8.82: v1(760,1365) 773.49,1378.49 J1.G3 ; v1(765,1450) 766.34,1451.34 J1.G2 792.36,1442.67 794.61,1440.42 848.48,1440.42 855.16,1447.1 855.16,1457.24 J1.16 ; v1(847,1295) 847,1296.67 855.75,1305.42 J1.19 ; J1.12 919.34,1458.42 919.34,1468.56 937.68,1486.91 945.82,1486.91 v1(947,1488.09) ; v1(950,1342) 950.12,1342.12 950.12,1371.88 J1.25 ; J1.9 966,1434 970,1430 973.33,1430 978.33,1425 v1(980,1425) ; J1.28 997.5,1342.5 v1(1000,1340) ; J1.6 1013.25,1431.75 v1(1025,1420) ; J1.31 1044.75,1335.25 v1(1045,1335) ; J1.3 J1.2 1076.84,1458.42 1076.84,1471.84 v1(1097,1492) ; J1.33 1076.25,1401.25 v1(1080,1405) ; J1.G4 1139,1379.14 v1(1139,1416) ; J1.G1 1139.32,1451.01 1139.32,1416.32 v1(1139,1416) ; v1(1180,1375) v1(1139,1416)
MIPI_CSI_MCLK: J1.32 P1.19 | length 1427.5
  Top Layer w8.82: P1.19 833.94,188.59 828.57,193.95 828.57,236.57 1227,635 1227,1112 v1(1062,1277)
  Bottom Layer w8.82: J1.32 1060.5,1342 1062,1340.5 v1(1062,1277)
NVCC_1V8: C5.2 C6.2 J1.13 P1.5 | length 232.4
  Top Layer w8.82: C5.2@866.69,1559 869.5,1556.18 893.82,1556.18 v1(895,1555) 896.18,1556.18 923.5,1556.18 C6.2 ; v1(1100,125) 1109.53,134.53 P1.5
  SIG_1 w11.99: v1@894,1555 v1(895,1555)
  Bottom Layer w8.82: v1(895,1555) 910,1540 910,1485 908.17,1485 903,1479.83 J1.13
Trigger: J1.20 R1.1 R2.2 TP1.1 | length 1875.5
  Top Layer w8.82: v1(1400,405) 1400,377.33 R2.2 1384.67,358 1384.67,293 R1.1 1414.67,319 TP1.1
  Bottom Layer w8.82: J1.20 871.5,1291.96 715,1135.46 715,730 900,545 1380,545 1400,525 v1(1400,405)
VCAM_1V2: C3.2 C4.2 J1.23 J1.24 P1.27 P1.28 | length 190.8
  Top Layer w8.82: v1(650,125) 656.77,131.77 P1.28 ; v1(675,225) 676.46,223.54 P1.27 ; v1(925,1265) 926,1264 954.31,1264 ; v1(925,1305) 927,1307 954.31,1307
  Bottom Layer w8.82: J1.23 918.75,1346.25 920,1345
VCAM_2V8: C1.2 C2.2 J1.1 J1.17 J1.18 J1.34 P1.1 P1.17 P1.32 R1.2 | length 808.3
  Top Layer w8.82: v1(550,150) 555.2,150 578.03,172.84 P1.32 ; C1.2 746.5,1312.19 791.5,1312.19 C2.2 821.01,1312.69 833.33,1325 v1(835,1325) ; P1.17 873.31,129.83 875,128.14 v1(875,125) ; v1(1200,225) 1188.27,213.27 P1.1 1330.71,180.71 1346.35,196.35 1346.35,239.47 1345.33,240.48 R1.2
  Bottom Layer w8.82: v1(767,1496) 834.83,1496 840,1490.83 J1.17 ; v1(835,1325) 840,1330 J1.18 ; J1.1 1110,1439.83 1110,1390 J1.34 1092,1338 v1(1100,1330)

## Polygon pours and split planes (outlines as drawn)
VCAM_1V2 on Bottom Layer "VCAM_1V2_L06_P008" (solid, pour order 8): 915,1390 915,1240 960,1240 960,1333 940,1333 940,1390 920,1390
VCAM_1V2 on SIG_2 "VCAM_1V2_L04_P009" (solid, pour order 9): 50,1400 975,1400 975,25 50,25
NVCC_1V8 on SIG_2 "NVCC_1V8_L04_P010" (solid, pour order 10): 25,1575 25,1425 1025,1425 1025,25 2075,25 2075,825 1675,825 1675,1575
VCAM_2V8 on SIG_1 "VCAM_2V8_L03_P005" (solid, pour order 5): 50,1550 1675,1550 1675,800 2050,800 2050,50 50,50
GND on GND_2 (split plane): 1704.9,848 1705.29,844.08 1706.43,840.31 1708.29,836.83 1710.79,833.79 1713.83,831.29 1717.31,829.43 1721.08,828.29 1725,827.9 2079.9,827.9 2079.9,20.1 20.1,20.1 20.1,1579.9 1704.9,1579.9
GND on GND (split plane): 1704.9,848 1705.29,844.08 1706.43,840.31 1708.29,836.83 1710.79,833.79 1713.83,831.29 1717.31,829.43 1721.08,828.29 1725,827.9 2079.9,827.9 2079.9,20.1 20.1,20.1 20.1,1579.9 1704.9,1579.9

## Silkscreen, mask and mechanical layers (free items; w line width, h text height)
Top Overlay:
  text "PN 16016-100 / SBC CAM BRD  / REV 2" at 1550,82 h60
BRD_Outline:
  the board outline again, w1